# Altium PCB PCB2.PcbDoc
Units mm, origin at the board's own origin, x right, y up, seen from the top; angles counter-clockwise.
Board outline 100 x 120 mm, 2 copper layers (Top Layer, Bottom Layer); 60 components, 66 nets, 318 pads, 53 vias.
Unrouted connection lines stored in the file: 4.
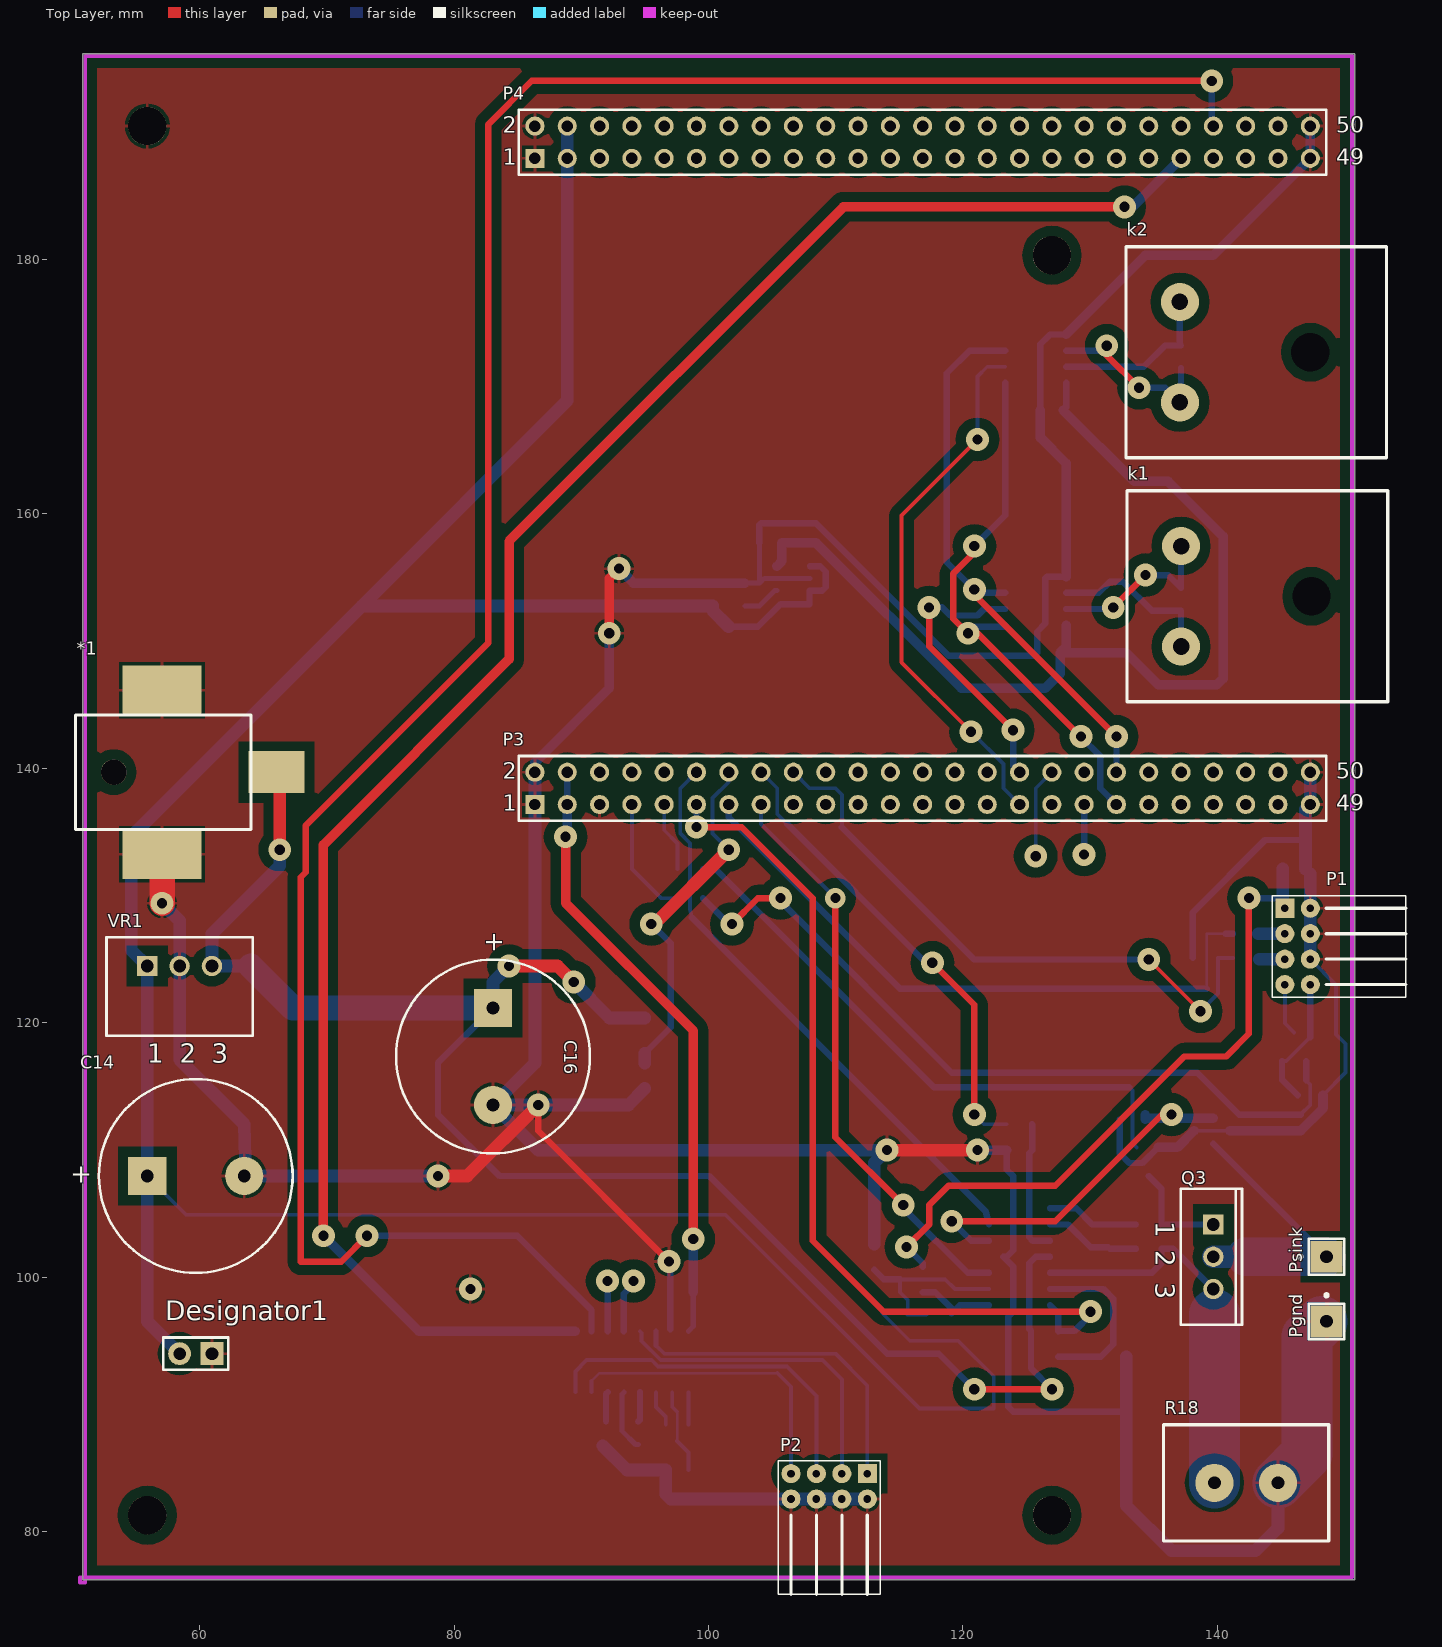
[diagram p0: Top Layer view]
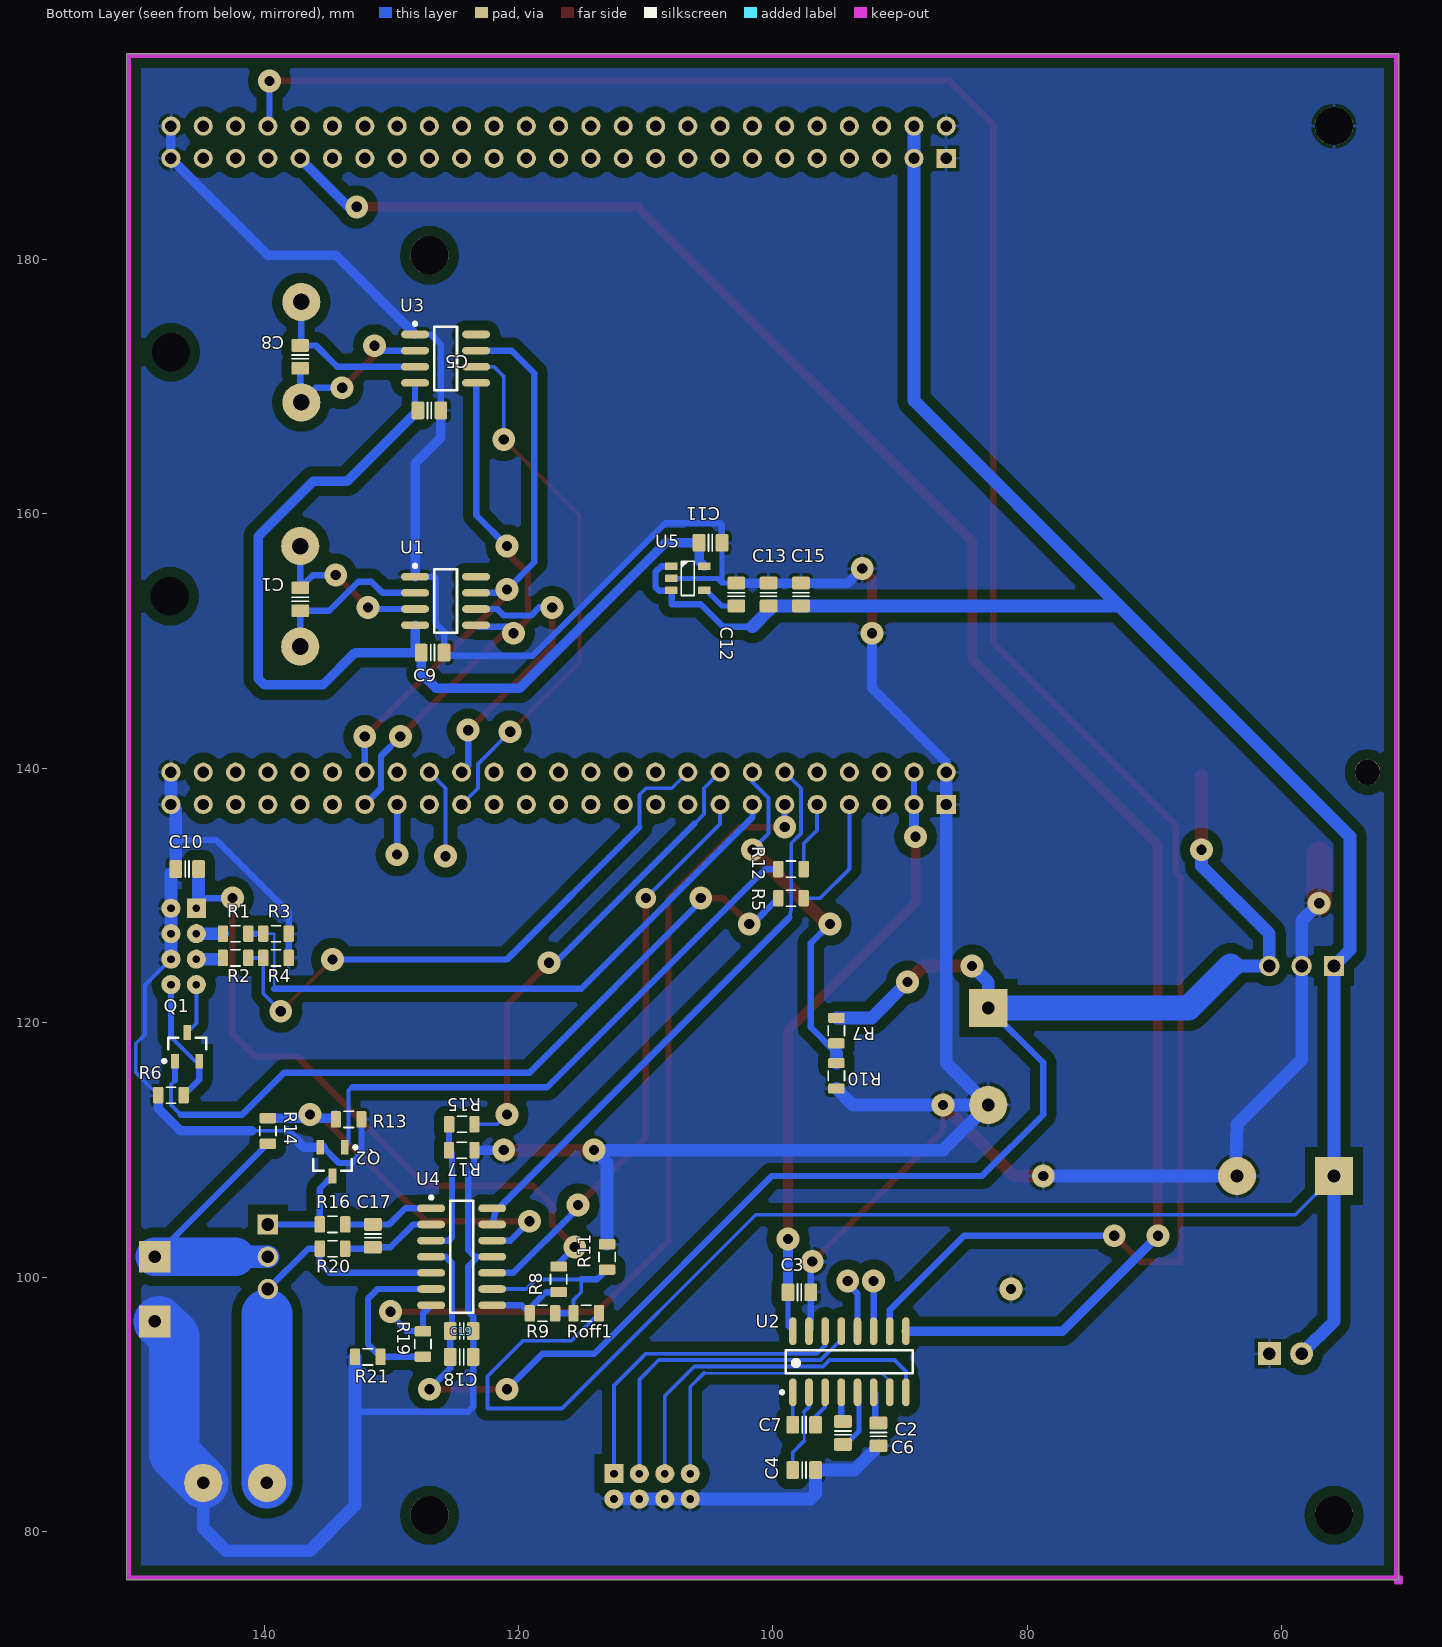
[diagram p1: Bottom Layer view, seen from below]
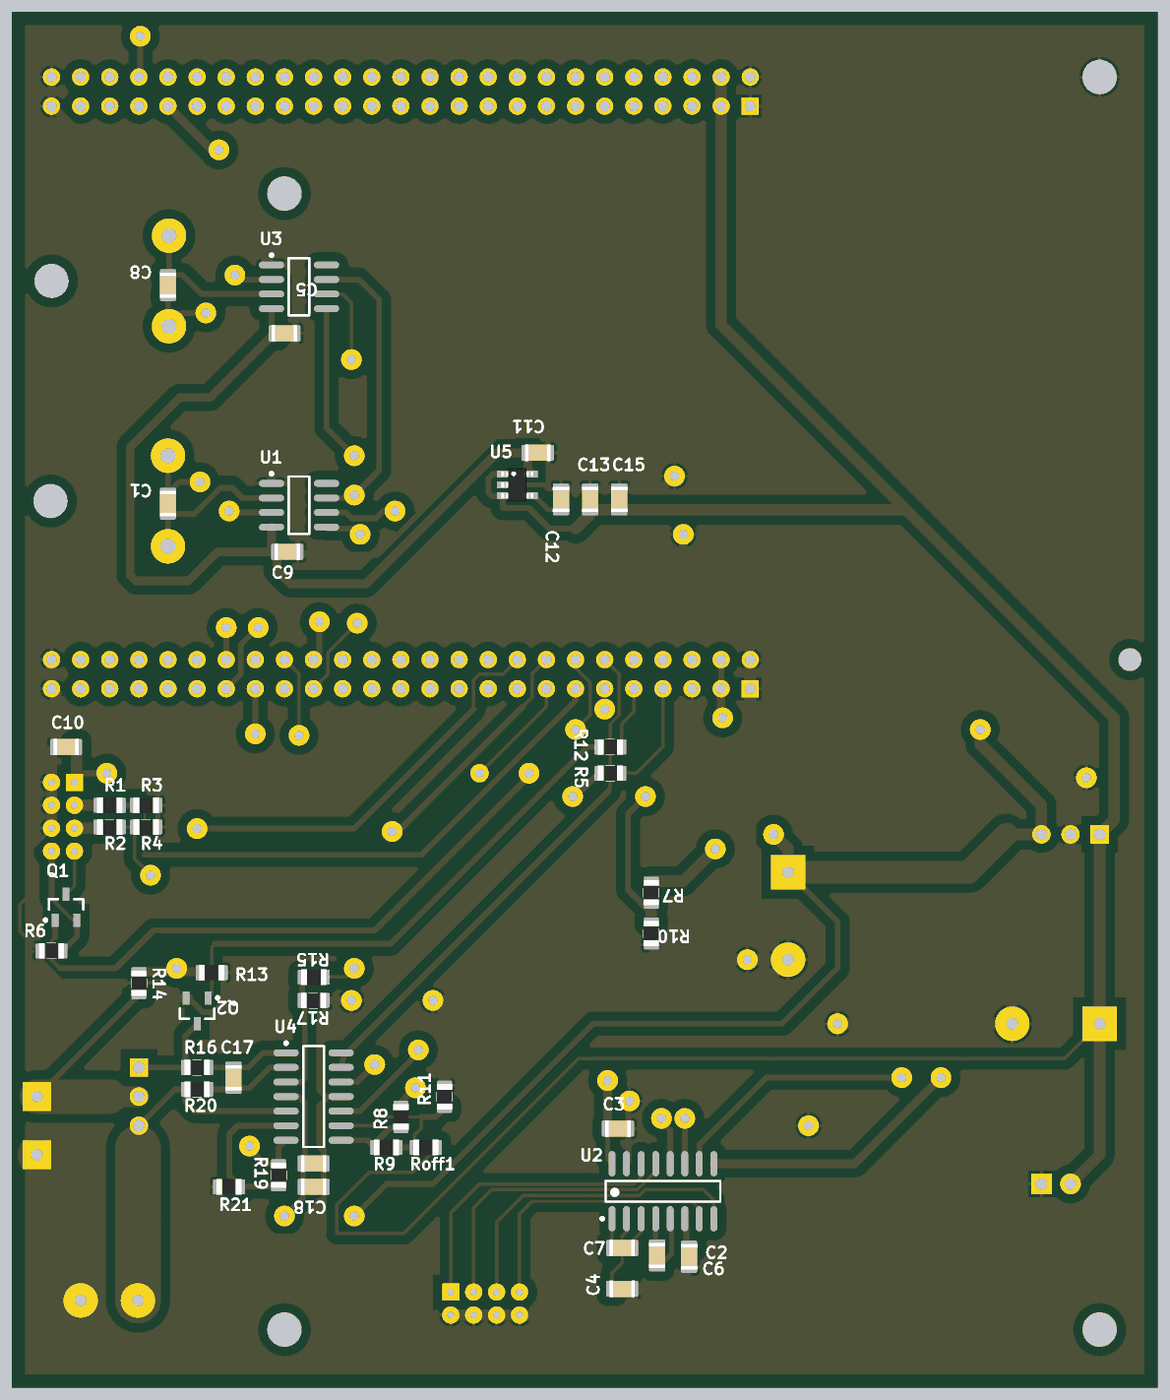
[diagram p2: 3D render of the assembled board from below, using the file's embedded part models]

## Layer stack, top to bottom
Top Layer: signal copper 0.0356
Dielectric: dielectric 0.32, FR-4, Dk 4.8
Bottom Layer: signal copper 0.0356

## Board outline
50.8,76.2 150.8,76.2 150.8,196.2 50.8,196.2

## Design rules (kind name [scope] priority, off if disabled: settings)
Clearance Clearance_1 [InPolygon] p1: gap=0.8
Clearance [All] p2: gap=0.2
HoleSize [All] p1: absolutevalues=TRUE maxlimit=4 minlimit=0.4 maxpercent=80.000 minpercent=20.000
HoleToHoleClearance [All] p1: gap=0.1 allowstackedmicrovias=TRUE
MinimumSolderMaskSliver [All] p1: minsoldermaskwidth=0
PolygonConnect [All] p1: connectstyle=Relief reliefconductorwidth=0.254 reliefentries=4 polygonreliefangle="90 Angle" airgapwidth=0.254
RoutingVias [All] p1: holewidth=0.8 width=1.8 viastyle="Through Hole" minholewidth=0.8 minwidth=1.8 maxholewidth=0.8 maxwidth=2
SilkToSilkClearance [All] p1: silktosilkclearance=0
SilkToSolderMaskClearance [IsPad] p1: minsilkscreentomaskgap=0 clearancetoexposedcopper=TRUE
SolderMaskExpansion [All] p1: expansion=0
Width [All] p1: maxlimit=5 minlimit=0.2 preferedwidth=0.4
23 further rules are at their usual default settings.

## Components (designator, comment, footprint, x,y, rotation, side; value= is the part's Value field where it differs from the comment)
*1 "DC-Jack" DC-Jack 66.04,139.7 r0 top
C1 "Cap" CAPC2012X135N 137.16,153.3 r90 bottom
C2 "Cap" CAPC2012X135N 91.694,87.63 r270 bottom
C3 "Cap" CAPC2012X135N 97.906,98.806 r0 bottom
C4 "Cap" CAPC2012X135N 97.536,84.836 r0 bottom
C5 "Cap" CAPC2012X135N 127,168.148 r0 bottom
C6 "Cap" CAPC2012X135N 94.488,87.746 r270 bottom
C7 "Cap" CAPC2012X135N 97.536,88.392 r180 bottom
C8 "Cap" CAPC2012X135N 137.16,172.35 r90 bottom
C9 "Cap" CAPC2012X135N 126.746,149.098 r0 bottom
C10 "Cap" CAPC2012X135N 146.05,132.08 r180 bottom
C11 "Cap" CAPC2012X135N 104.902,157.734 r0 bottom
C12 "Cap" CAPC2012X135N 102.87,153.67 r270 bottom
C13 "Cap" CAPC2012X135N 100.33,153.67 r270 bottom
C14 "Cap Pol1" RB7.6-15 59.69,107.95 r180 top
C15 "Cap" CAPC2012X135N 97.79,153.67 r270 bottom
C16 "Cap Pol1" RB7.6-15 83.058,117.348 r90 top
C17 "Cap" CAPC2012X135N 131.445,103.24 r90 bottom
C18 "Cap" CAPC2012X135N 124.46,93.726 r0 bottom
C19 "Cap" CAPC2012X135N 124.46,95.758 r0 bottom
Designator1 "Comment" HDR1X2 60.96,93.98 r180 top
k1 "Thermocouple Connector" "K-Type Thermocouple Connector" 137.16,149.58 r180 top
k2 "Thermocouple Connector" "K-Type Thermocouple Connector" 137.07,168.77 r180 top
P1 "Header 4X2H" CON8 145.32,129 r0 top
P2 "Header 4X2H" CON8 112.49,84.55 r270 top
P3 "Header 25X2" HDR2X25 86.36,137.16 r0 top
P4 "Header 25X2" HDR2X25 86.36,187.96 r0 top
Pgnd "Plug" PIN1 148.59,96.52 r0 top
Psink "Plug" PIN1 148.59,101.6 r90 top
Q1 "NPN" SOT-23_N 146.05,118.11 r90 bottom
Q2 "NPN" SOT-23_N 134.62,109.075 r270 bottom
Q3 "MOSFET-N" TO-220-AB 139.7,101.6 r270 top
R1 "Res2" RESC2012X70N 142.24,127 r0 bottom
R2 "Res2" RESC2012X70N 142.24,125.095 r0 bottom
R3 "Res2" RESC2012X70N 139.065,127 r0 bottom
R4 "Res2" RESC2012X70N 139.065,125.095 r0 bottom
R5 "Res2" RESC2012X70N 98.568,129.794 r180 bottom
R6 "Res2" RESC2012X70N 147.32,114.3 r180 bottom
R7 "Res2" RESC2012X70N 94.996,119.38 r90 bottom
R8 "Res2" RESC2012X70N 116.84,99.822 r90 bottom
R9 "Res2" RESC2012X70N 118.11,97.155 r0 bottom
R10 "Res2" RESC2012X70N 94.996,115.824 r90 bottom
R11 "Res2" RESC2012X70N 113.03,101.584 r270 bottom
R12 "Res2" RESC2012X70N 98.568,132.08 r180 bottom
R13 "Res2" RESC2012X70N 133.35,112.395 r180 bottom
R14 "Res2" RESC2012X70N 139.7,111.49 r90 bottom
R15 "Res2" RESC2012X70N 124.444,112.014 r180 bottom
R16 "Res2" RESC2012X70N 134.62,104.14 r0 bottom
R17 "Res2" RESC2012X70N 124.46,109.982 r0 bottom
R18 "Cer7W" Cer7W 144.78,83.82 r180 top
R19 "Res2" RESC2012X70N 127.508,94.742 r90 bottom
R20 "Res2" RESC2012X70N 134.62,102.235 r0 bottom
R21 "Res2" RESC2012X70N 131.842,93.726 r180 bottom
Roff1 "Res2" RESC2012X70N 114.665,97.155 r0 bottom
U1 "MAX31855KASA+T" MAXM-S8+4_N 125.73,153.162 r180 bottom
U2 "MAX3232CD" TI-D16_N 93.98,93.345 r90 bottom
U3 "MAX31855KASA+T" MAXM-S8+4_N 125.73,172.212 r180 bottom
U4 "TLC274BCDG4" TI-D14_N 124.46,101.6 r180 bottom
U5 "3.3V" SOT23-5 106.68,154.94 r180 bottom
VR1 "RECOM 7805" Recom78xx 58.42,124.46 r0 top

## Footprints (in the part's own frame and the unit in brackets; to place one, negate y for a bottom-side part, rotate by r counter-clockwise, add the part's x,y. Pads: shape width x height; smd on the part's side, far side on the other; paste and mask are expansions set on the pad)
CAPC2012X135N [mm] "Chip Capacitor, Body 2.0x1.2mm, EIA 0805, IPC Medium Density"
  round 0.254 on Mech15: 0(0,0)
  rrect25% 1x1.4 smd: 1(-0.9,0) 2(0.9,0)
  Top Layer pour cut-out: -0.675,0.7 -0.475,0.9 0.475,0.9 0.675,0.7 0.675,-0.7 0.475,-0.9 -0.475,-0.9 -0.675,-0.7
  silkscreen extent -0.15,-0.65 0.15,0.65, body extent -1.1,-0.72 1.1,0.73, height 1.34
Cer7W [mm]
  round 3 hole 1: 1(0,0) 2(5,0)
  silkscreen extent -4,-4.57 9,4.57
CON8 [mm]
  rect 1.5x1.5 hole 0.6: 1(0,0)
  round 1.5 hole 0.6: 2(2,0) 3(0,-2) 4(2,-2) 5(0,-4) 6(2,-4) 7(0,-6) 8(2,-6)
  silkscreen extent -1,-7 9.5,1
DC-Jack [mm]
  round 2 hole 2 paste+0 mask+0: 0(-12.8,0)
  rect 6.2x3.9 smd: 1(-9,-6.45) 1(-9,6.45)
  rect 4.4x3.3 smd: 2(0,0)
  silkscreen extent -15.8,-4.5 -2,4.5
HDR1X2 [mm] "Connector; Header; 2 Position"
  rect 1.8x1.8 hole 1: 1(0,0)
  round 1.8 hole 1: 2(2.54,0)
  silkscreen extent -1.27,-1.27 3.81,1.27
HDR2X25 [mm] "Connector; Header; 25x2 Position"
  rect 1.5x1.5 hole 0.9: 1(0,0)
  round 1.5 hole 0.9: 2(0,2.54) 3(2.54,0) 4(2.54,2.54) 5(5.08,0) 6(5.08,2.54) 7(7.62,0) 8(7.62,2.54) 9(10.16,0) 10(10.16,2.54) 11(12.7,0) 12(12.7,2.54) 13(15.24,0) 14(15.24,2.54) 15(17.78,0) 16(17.78,2.54) 17(20.32,0) 18(20.32,2.54) 19(22.86,0) 20(22.86,2.54) 21(25.4,0) 22(25.4,2.54) 23(27.94,0) 24(27.94,2.54) 25(30.48,0) 26(30.48,2.54) 27(33.02,0) 28(33.02,2.54) 29(35.56,0) 30(35.56,2.54) 31(38.1,0) 32(38.1,2.54) 33(40.64,0) 34(40.64,2.54) 35(43.18,0) 36(43.18,2.54) 37(45.72,0) 38(45.72,2.54) 39(48.26,0) 40(48.26,2.54) 41(50.8,0) 42(50.8,2.54) 43(53.34,0) 44(53.34,2.54) 45(55.88,0) 46(55.88,2.54) 47(58.42,0) 48(58.42,2.54) 49(60.96,0) 50(60.96,2.54)
  silkscreen extent -1.27,-1.27 62.23,3.81
"K-Type Thermocouple Connector" [mm]
  round 3 hole 1.3: 1(0,-7.9) 2(0,0)
  round 0 hole 3 unplated: 3(-10.25,-3.95)
  silkscreen extent -16.25,-12.25 4.25,4.35
MAXM-S8+4_N [mm] "SOIC, 8-Leads, Body 4.9x3.9mm, Pitch 1.27mm, IPC Medium Density"
  oval 2.2x0.6 smd: 1(-2.4,1.905) 2(-2.4,0.635) 3(-2.4,-0.635) 4(-2.4,-1.905) 5(2.4,-1.905) 6(2.4,-0.635) 7(2.4,0.635) 8(2.4,1.905)
  silkscreen extent -2.53,-2.5 0.9,2.88, body extent -2,-2.5 2,2.5, height 1.75
PIN1 [mm] "Connector; Plug"
  rect 2.5x2.5 hole 1: 1(0,0)
  silkscreen extent -1.4,-1.4 1.4,2.17
RB7.6-15 [mm] "Polarized Capacitor (Radial); 2 Leads"
  rect 3x3 hole 1: 1(3.81,0)
  round 3 hole 1: 2(-3.81,0)
  silkscreen extent -7.62,-7.62 7.62,7.62
Recom78xx [mm]
  rect 1.6x1.6 hole 1: 1(-2.54,0)
  round 1.6 hole 1: 2(0,0) 3(2.54,0)
  silkscreen extent -5.75,-5.5 5.75,2.25
RESC2012X70N [mm] "Chip Resistor, Body 2.0x1.2mm, EIA 0805, IPC Medium Density"
  round 0.254 on Mech15: 0(0,0)
  rrect25% 0.8x1.3 smd: 1(-1,0) 2(1,0)
  Top Layer pour cut-out: -0.725,0.65 -0.525,0.85 0.525,0.85 0.725,0.65 0.725,-0.65 0.525,-0.85 -0.525,-0.85 -0.725,-0.65
  silkscreen extent -0.38,-0.64 0.38,0.64, body extent -1.1,-0.67 1.1,0.68, height 0.69
SOT23-5 [mm]
  round 0.5 on Mech15: 0(0,0)
  rrect25% 1x0.6 smd: 1(-1.3,0.95) 2(-1.3,0) 3(-1.3,-0.95) 4(1.3,-0.95) 5(1.3,0.95)
  silkscreen extent -0.51,-1.35 0.51,1.35, body extent -1.4,-1.45 1.4,1.45, height 1.44
SOT-23_N [mm] "SOT23, 3-Leads, Body 2.9x1.3mm, Pitch 0.95mm, Lead Span 2.5mm, IPC Medium Density"
  rect 1.15x0.6 smd: 1(-1.125,0.95) 2(-1.125,-0.95) 3(1.125,0)
  silkscreen extent -1.25,-1.5 0.7,1.93, body extent -0.7,-1.5 0.7,1.5, height 1.1
TI-D14_N [mm] "SOIC, 14-Leads, Body 8.65x3.90mm, Pitch 1.27mm, IPC Medium Density"
  oval 2.2x0.6 smd: 1(-2.4,3.81) 2(-2.4,2.54) 3(-2.4,1.27) 4(-2.4,0) 5(-2.4,-1.27) 6(-2.4,-2.54) 7(-2.4,-3.81) 8(2.4,-3.81) 9(2.4,-2.54) 10(2.4,-1.27) 11(2.4,0) 12(2.4,1.27) 13(2.4,2.54) 14(2.4,3.81)
  silkscreen extent -2.53,-4.4 0.9,4.78, body extent -2,-4.38 2,4.38, height 1.75
TI-D16_N [mm] "SOIC, 16-Leads, Body 9.9x3.9mm, Pitch 1.27mm, IPC Medium Density"
  oval 2.2x0.6 smd: 1(-2.4,4.445) 2(-2.4,3.175) 3(-2.4,1.905) 4(-2.4,0.635) 5(-2.4,-0.635) 6(-2.4,-1.905) 7(-2.4,-3.175) 8(-2.4,-4.445) 9(2.4,-4.445) 10(2.4,-3.175) 11(2.4,-1.905) 12(2.4,-0.635) 13(2.4,0.635) 14(2.4,1.905) 15(2.4,3.175) 16(2.4,4.445)
  silkscreen extent -2.52,-5 0.9,5.42, body extent -1.99,-5 1.99,5, height 1.75
TO-220-AB [mm] "TO, Thru-Hole, Vertical, Heatsink Mounted; 3 In-Line Leads; Pitch 2.54 mm"
  rect 1.6x1.6 hole 1: 1(-2.54,0)
  round 1.6 hole 1: 2(0,0) 3(2.54,0)
  silkscreen extent -5.35,-2.55 5.35,2.25

## Part data
C1 C2 C3 C4 C5 C6 C7 C8 C9 C10 C11 C12 C13 C15 C17 C18 C19: "Capacitor"
C14 C16: "Polarized Capacitor (Radial)"
P1 P2: "Header, 4-Pin, Dual row, Right Angle"
P3 P4: "Header, 25-Pin, Dual row"
Q1 Q2: "NPN Bipolar Transistor"
Q3: "N-Channel MOSFET"
R1 R2 R3 R4 R5 R6 R7 R8 R9 R10 R11 R12 R13 R14 R15 R16 R17 R19 R20 R21 Roff1: "Resistor"
R18: library part Res2, "Resistor"
U1 U3: "Cold Junction Compensated Thermocouple to Digital Converter, 14 Bits Temperature Resolution, -40 to 125 degC, 8-Pin SOIC (S8+4), Pb-Free, Tape ang Reel"
U2: "3-V to 5.5-V Multichannel RS-232 Line Driver / Receiver with ±15-kV ESD Protection, 0 to 70 degC, 16-Pin SOIC (D), Green (RoHS & no Sb/Br)"
U4: "LinCMOS(TM) Precision Quad Operational Amplifier, 3 to 16 V, 0 to 70 degC, 14-pin SOIC (D14), Green (RoHS & no Sb/Br)"
U5: library part LinREG_3V3_400mA_TPS73633DBV, "IC LDO Regulator 3.3V 400mA SOT23-5 SMD"
VR1: library part "Volt Reg", "Voltage Regulator"

## Free pads (board coordinates)
  round 3 hole 3: 0(55.88,81.28) 0(55.88,190.5) 0(127,81.28) 0(127,180.34)

## Via types
v1: diameter 1.8, hole 0.8, Top Layer to Bottom Layer, 52 vias
v2: diameter 1.6, hole 0.8, Top Layer to Bottom Layer, 1 vias

## Nets (pads, with @x,y where several pads share a name; then routed paths per layer and width w, separated by ;. In a path a pad name is that pad's centre, name@x,y a point inside that pad or via, vN(x,y) a via of type N, cw(c..) or ccw(c..) an arc to the next point about the centre after c; other vN are vias at no path point)
3V: P4.5 P4.6
5V: C13.2 C14.1 C15.2 Designator1.2 P4.3 P4.4 Roff1.1 U5.1 U5.3 VR1.1 | length 241.7
  Bottom Layer w0.3: C14.1 58.928,104.902 101.346,104.902 116.586,89.662 122.428,89.662 122.428,92.202 119.634,94.996 115.824,94.996 Roff1.1
  Bottom Layer w0.5: 101.6,151.13 103.886,151.13 105.664,152.908 107.95,152.908 107.95,153.96 108.93,153.96 109.22,154.25 109.22,155.448 108.778,155.89 U5.1
  Bottom Layer w1: Designator1.2 55.88,96.52 C14.1 VR1.1 54.61,125.73 54.61,134.62 72.76,152.77 ; P4.4 P4.3 88.9,168.91 72.76,152.77 ; 101.6,151.13 100.33,152.4 C13.2 C15.2 72.76,152.77
AGND: *1.1 C2.2 C3.1 C4.1 C5.1 C9.1 C10.1 C11.1 C12.1 C13.1 C14.2 C15.1 C16.2 C18.1 C19.1 Designator1.1 P1.2 P1.4 P1.6 P2.2 P2.4 P2.6 P2.8 P3.1 P3.2 P3.5 P3.49 P3.50 P4.1 P4.2 P4.49 P4.50 pad.0@55.88,190.5 Pgnd.1 Q2.2 R3.1 R4.1 R6.1 R10.1 R11.1 R13.2 R17.1 R18.1 R21.1 U1.1 U2.15 U3.1 U4.11 U5.2 VR1.2 | length 448.5
  Top Layer w0.5: v1(86.614,113.538) 86.614,111.506 v1(96.901,101.219)
  Top Layer w0.75: v1(92.202,150.622) 92.202,154.94 v1(92.964,155.702)
  Top Layer w1: v1(78.74,107.95) 81.026,107.95 v1(86.614,113.538) ; v1(114.046,109.982) v1(121.158,109.982)
  Top Layer w2: v1(57.04,129.396) *1.1@57.04,133.25
  Bottom Layer w0.3: 138.176,111.506 140.97,111.506 ; P1.6 149.352,122.968 149.352,119.086 150.094,118.344 150.094,116.074 R6.1
  Bottom Layer w0.4: C12.1 104.024,154.57 ; C11.1 104.002,154.592 104.024,154.57 ; U5.2 104.394,154.94 104.024,154.57
  Bottom Layer w0.5: v1(96.901,101.219) 97.006,101.114 C3.1 U2.15@97.006,95.894 ; C11.1 104.002,159.142 104.013,159.131 104.14,159.258 108.458,159.258 118.872,148.844 125.592,148.844 C9.1 125.846,150.738 126.492,151.384 126.492,154.94 126.619,155.067 U1.1 ; R17.1 123.46,108.442 123.952,107.95 123.952,102.108 123.444,101.6 123.19,101.6 123.952,100.838 123.952,97.282 123.56,96.89 C19.1 C18.1 123.56,89.8 123.952,89.408 132.842,89.408 ; C5.1 126.1,173.344 126.873,174.117 U3.1 ; R13.2 132.334,112.379 132.334,109.728 133.096,108.966 134.125,108.966 Q2.2@135.359,110.2 ; R4.1 R3.1 138.065,128.667 143.764,134.366 146.95,134.366
  Bottom Layer w0.75: P3.2 86.36,140.462 92.202,146.304 v1(92.202,150.622) ; v1(92.964,155.702) 94.096,154.57 C15.1 C13.1 C12.1 ; v1(121.158,109.982) R17.1 ; C5.1 126.1,166 128.13,163.97 U1.1 ; U3.1 134.353,180.34 139.7,180.34 P4.49 P4.50 ; Q2.2@135.359,110.2 Q2.2 136.87,110.2 138.176,111.506 ; 140.97,111.506 146.558,111.506 148.32,113.268 R6.1
  Bottom Layer w1: v1(57.04,129.396) 58.42,128.016 VR1.2 58.42,117.094 63.5,112.014 63.627,107.95 v1(78.74,107.95) ; P3.2 P3.1 86.36,116.84 C16.2 ; C2.2 93.588,84.836 C4.1 96.636,82.942 97.028,82.55 P2.8 P2.6 P2.4 P2.2 ; R10.1 93.71,113.538 v1(86.614,113.538) C16.2 ; R11.1 113.03,108.966 v1(114.046,109.982) 86.614,109.982 C16.2 ; R21.1 132.842,82.042 136.398,78.486 143.002,78.486 144.78,80.264 R18.1 ; C10.1 146.95,134.366 146.95,136.79 P3.49 P3.50 ; P1.6 P1.4 P1.2 C10.1@147.32,131.71
  Bottom Layer w4: R18.1 147.066,86.106 147.066,95.336 Pgnd.1@148.25,96.52
  other v1: 81.28,99.06
BOOT0: P4.21
CMON: P1.5 R2.2 | length 2
  Bottom Layer w1: R2.2@143.335,125 P1.5
CS0: P3.31 U3.6 | length 42.5
  Top Layer w0.3: v1(120.65,142.875) 115.189,148.336 115.189,159.893 v1(121.158,165.862)
  Bottom Layer w0.3: v1(120.65,142.875) 123.19,140.335 123.19,138.43 P3.31 ; v1(121.158,165.862) 121.158,170.815 121.92,171.577 U3.6
CS1: P3.32 U1.6 | length 22.4
  Top Layer w0.5: v1(117.348,152.654) 117.348,149.606 v1(123.952,143.002)
  Bottom Layer w0.5: v1(117.348,152.654) 118.364,152.654 118.999,152.019 121.158,152.019 121.666,152.527 U1.6 ; v1(123.952,143.002) 123.952,140.208 P3.32
DAC1: P3.16 R15.2 | length 37
  Top Layer w0.5: v1(117.602,124.714) 120.904,121.412 v1(120.904,112.776)
  Bottom Layer w0.3: P3.16 105.41,138.43 105.41,136.398 106.172,135.636 ; v1(120.904,112.776) 121.666,112.014 R15.2
  Bottom Layer w0.5: 106.172,135.636 117.094,124.714 v1(117.602,124.714)
DAC2: P3.15 U4.10 | length 45.1
  Top Layer w0.5: v2(109.982,129.794) 109.982,110.998 v1(115.316,105.664) v1@115.824,105.664
  Bottom Layer w0.3: P3.15 104.14,135.636 v2(109.982,129.794)
  Bottom Layer w0.5: v1@115.57,105.156 120.396,100.33 U4.10
DGND: P1.8 Q1.2 R6.2 | length 10.3
  Bottom Layer w0.3: Q1.2 145.433,116.985 147.32,118.872
  Bottom Layer w0.5: Q1.2 145.1,115.52 R6.2 ; 147.32,118.872 P1.8
GFET: Q2.3 Q3.1 R16.2 | length 8.3
  Bottom Layer w0.5: Q2.3 135.62,106.95 R16.2 Q3.1
ICONTROLV: C10.2 P1.1 R8.2 | length 52.4
  Top Layer w0.5: v1(115.57,102.362) 117.348,104.14 117.348,105.664 118.872,107.188 127.254,107.188 137.414,117.348 140.716,117.348 142.494,119.126 v1(142.494,129.794)
  Bottom Layer w0.5: v1(115.57,102.362) 116.84,101.092 R8.2 ; v1(142.494,129.794) 144.526,129.794
  Bottom Layer w1: P1.1@145.15,129.17 C10.2
MISO: P3.38 U1.7 U3.7 | length 44.3
  Top Layer w0.5: v1@120.904,153.67 v1(132.08,142.494)
  Bottom Layer w0.5: v1@120.904,153.797 U1.7 ; v1(120.904,154.051) 118.745,156.21 118.745,171.069 120.523,172.847 U3.7 ; P3.38 v1(132.08,142.494)
MOSI: P3.39
NetC1_1: C1.1 k1.2 U1.2 | length 13.2
  Bottom Layer w0.5: U1.2 130.683,153.797 131.572,154.686 132.588,154.686 134.874,152.4 C1.1 k1.2
NetC1_2: C1.2 k1.1 U1.3 | length 13.8
  Top Layer w0.5: v1(131.826,152.654) v1(134.366,155.194)
  Bottom Layer w0.5: U1.3 131.699,152.527 v1(131.826,152.654) ; v1(134.366,155.194) 136.166,155.194 C1.2 k1.1
NetC2_1: C2.1 U2.6 | length 2.4
  Bottom Layer w0.5: C2.1@91.948,88.646 91.948,90.818 U2.6
NetC4_2: C4.2 U2.2 | length 6.6
  Bottom Layer w0.2: 97.536,87.122 97.536,89.408
  Bottom Layer w0.3: U2.2 97.155,89.789 97.536,89.408 ; 97.536,87.122 98.436,86.222 C4.2
NetC6_1: C6.1 U2.4 | length 2.4
  Bottom Layer w0.5: C6.1 94.615,88.773 U2.4
NetC6_2: C6.2 U2.5 | length 4.8
  Bottom Layer w0.4: U2.5 93.218,90.818 93.218,87.884 94.256,86.846 C6.2
NetC7_1: C7.1 U2.1 | length 2.5
  Bottom Layer w0.3: C7.1 U2.1@98.436,90.934
NetC7_2: C7.2 U2.3 | length 2.9
  Bottom Layer w0.3: U2.3 95.885,89.789 96.636,89.038 C7.2
NetC8_1: C8.1 k2.2 U3.2 | length 13.4
  Top Layer w0.5: v1(131.318,173.228) 131.318,172.466 v1(133.858,169.926)
  Bottom Layer w0.5: U3.2 v1@130.937,172.847 ; v1(133.858,169.926) 135.914,169.926 k2.2 ; k2.2@137.16,168.86 C8.1
NetC8_2: C8.2 k2.1 U3.3 | length 13.1
  Bottom Layer w0.5: U3.3 134.239,171.577 135.912,173.25 C8.2 ; C8.2@137.07,173.34 k2.1
NetC12_2: C12.2 U5.4 | length 3
  Bottom Layer w0.4: C12.2 104.002,152.77 105.222,153.99 U5.4
NetC17_1: C17.1 R20.1 U4.2 | length 7.5
  Bottom Layer w0.5: U4.2 128.27,104.14 130.07,102.34 C17.1 131.55,102.235 R20.1
NetC17_2: C17.2 R16.1 U4.1 | length 7.3
  Bottom Layer w0.5: U4.1 128.905,105.41 130.175,104.14 C17.2 R16.1
NetPsink_1: Psink.1 Q3.2 R14.1 | length 21.5
  Bottom Layer w0.5: R14.1 Psink.1
  Bottom Layer w1.8: Q3.2 142.24,101.6
  Bottom Layer w3: 142.24,101.6 Psink.1
NetQ1_2: Q1.1 R5.1 | length 60.5
  Top Layer w0.5: v1(101.854,127.762) 103.886,129.794 v1(105.664,129.794)
  Bottom Layer w0.3: 146.558,112.776 147.32,113.538 147.32,115.15 147,115.47
  Bottom Layer w0.5: R5.1 101.6,127.762 v1(101.854,127.762) ; v1(105.664,129.794) 105.664,129.54 119.126,116.078 138.43,116.078 141.732,112.776 146.558,112.776 ; 147,115.47 Q1.1
NetQ2_2: Q2.1 R12.1 | length 45.6
  Bottom Layer w0.3: 133.08,114.935 133.35,114.665 133.35,110.52 Q2.1
  Bottom Layer w0.5: R12.1 100.584,132.08 117.729,114.935 133.08,114.935
NetQ3_3: Q3.3 R18.2 R20.2 U4.5 | length 30.8
  Bottom Layer w0.5: U4.5 134.874,100.33 135.62,101.076 R20.2 136.525,102.235 Q3.3
  Bottom Layer w1: 139.78,97.075 Q3.3@139.78,98.98
  Bottom Layer w4: R18.2 139.78,97.075
NetR8_1: R8.1 R9.2 U4.8 | length 6.4
  Bottom Layer w0.5: R8.1 117.84,98.822 119.11,97.552 R9.2 119.745,97.79 U4.8
NetR9_1: R9.1 R11.2 Roff1.2 U4.9 | length 14
  Bottom Layer w0.3: Roff1.2 115.665,98.203 115.062,98.806 115.062,99.822 118.618,99.822 119.38,99.06 U4.9
  Bottom Layer w0.5: R11.2 113.792,99.822 115.062,99.822 ; Roff1.2 R9.1
NetR13_1: R13.1 R14.2 U4.12 | length 30.1
  Top Layer w0.5: v1(119.126,104.394) 127.254,104.394 v1@136.144,113.284
  Bottom Layer w0.5: v1(119.126,104.394) 120.65,102.87 U4.12 ; v1@137.073,112.49 v1@137.073,112.522
  Bottom Layer w0.75: R13.1@134.35,112.76 R13.1 134.445,112.49 137.073,112.49 R14.2
  other v1: 136.398,112.776
NetR15_1: R15.1 R17.2 U4.3 | length 10.7
  Bottom Layer w0.5: R15.1 125.46,111.998 R17.2 125.222,109.744 125.222,103.124 125.476,102.87 U4.3
NetR19_1: R19.1 R21.2 U4.6 | length 13.6
  Bottom Layer w0.5: U4.6 131.064,99.06 131.826,98.298 131.826,94.71 R21.2 130.826,93.742 R19.1
PA0: P3.12 U4.13 U4.14 | length 46
  Bottom Layer w0.3: 98.692,128.27 98.552,128.918 98.552,134.112 97.79,134.874 97.79,138.43 P3.12
  Bottom Layer w0.5: 98.692,128.27 121.806,105.156 U4.13
PA1: P3.11 R19.2 U4.7 | length 70
  Top Layer w0.5: v1(99.06,135.382) 102.616,135.382 108.204,129.794 108.204,102.87 113.792,97.282 v1(130.048,97.282)
  Bottom Layer w0.5: v1(99.06,135.382) P3.11 ; U4.7 127.508,97.142 R19.2 127.524,95.758 128.778,95.758 130.048,97.028 v1(130.048,97.282)
PA2: P3.14 R7.1 R10.2 | length 28.1
  Top Layer w1: v1(95.504,127.762) 95.758,127.762 v1(101.6,133.604)
  Bottom Layer w0.3: v1(101.6,133.604) 100.33,134.874 100.33,137.668 101.6,138.938 P3.14
  Bottom Layer w0.5: 94.996,117.602 97.028,119.634 97.028,126.238 v1(95.504,127.762)
  Bottom Layer w1: R10.2 94.996,117.602
PA3: P3.13 R1.1 R3.2 | length 50.6
  Bottom Layer w0.2: 139.192,122.682 139.192,127 R3.2 140.653,127
  Bottom Layer w0.5: P3.13 101.6,136.144 115.062,122.682 139.192,122.682 ; 140.653,127 R1.1
PA6: P3.18 R2.1 R4.2 | length 47.2
  Top Layer w0.3: v1(134.62,124.968) v1(138.684,120.904)
  Bottom Layer w0.3: P3.18 107.95,138.43 109.982,138.43 110.49,137.922 110.49,135.382 ; v1(138.684,120.904) 140.065,122.285 R4.2 R2.1
  Bottom Layer w0.5: 110.49,135.382 120.904,124.968 v1(134.62,124.968)
PA7: P3.17
PA8: P4.43
PA13: P4.42
PA15: P4.40
PB12: P3.36
PC0: P3.8
PC1: P3.7 R5.2 | length 9.6
  Bottom Layer w0.3: P3.7 93.98,132.08 96.266,129.794 R5.2
PC2: P3.10
PC3: P3.9 R12.2 | length 5.5
  Bottom Layer w0.3: P3.9 96.52,135.128 97.568,134.08 R12.2
PD8: P3.40
PE15: P3.33
REM-SB: P1.7 Q1.3 | length 4.1
  Bottom Layer w0.3: P1.7 145.32,119.965 Q1.3
RXD1: P2.3 U2.13 | length 25.2
  Bottom Layer w0.3: U2.13 94.742,95.618 94.742,94.98 96.25,93.472 108.966,93.472 110.49,91.948 P2.3
RXD2: P2.5 U2.8 | length 28.2
  Bottom Layer w0.3: U2.8 89.535,92.583 90.424,93.472 95.543,93.472 96.043,92.972 106.172,92.972 108.49,90.654 P2.5
SCK: P3.37 U1.5 U3.5 | length 43.8
  Top Layer w0.5: v1(120.904,157.48) 120.904,156.972 119.253,155.321 119.253,151.765 v1(120.396,150.622) 121.158,150.622 v1(129.286,142.494)
  Bottom Layer w0.5: v1(120.396,150.622) 120.904,151.13 123.203,151.13 U1.5 ; v1(120.904,157.48) 123.33,159.906 U3.5 ; v1(129.286,142.494) 130.81,140.97 130.81,138.43 P3.37
TXD1: P2.1 U2.14 | length 26
  Bottom Layer w0.3: 95.885,94.615 96.52,93.98 109.982,93.98 112.49,91.472 P2.1
  Bottom Layer w0.4: 95.885,94.615 U2.14
TXD2: P2.7 U2.7 | length 24.1
  Bottom Layer w0.2: U2.7@90.805,91.821 91.44,92.456 105.41,92.456
  Bottom Layer w0.3: U2.7 U2.7@90.805,91.821 ; 105.41,92.456 106.49,91.376 P2.7
U1RX: P4.41 U2.9 | length 148.9
  Top Layer w0.75: v1(69.723,103.251) 69.723,133.985 84.328,148.59 84.328,157.861 110.617,184.15 v1(132.715,184.15)
  Bottom Layer w0.75: v1(69.723,103.251) 77.229,95.745 U2.9 ; v1(132.715,184.15) 133.35,184.15 P4.41
U1TX: P4.44 U2.10 | length 185
  Top Layer w0.5: v1(73.152,103.251) 71.12,101.219 67.945,101.219 67.945,131.445 68.326,131.826 68.326,135.509 82.677,149.86 82.677,190.627 86.106,194.056 v1(139.573,194.056)
  Bottom Layer w0.5: v1(73.152,103.251) 84.963,103.251 90.805,97.409 U2.10 ; P4.44@139.573,190.627 v1(139.573,194.056)
U3RX: P3.35 U2.11 | length 7.6
  Bottom Layer w0.5: U2.11 v1@92.075,99.441 ; v1(129.54,133.223) P3.35
  other v1: 92.075,99.695
U3TX: P3.34 U2.12 | length 11.1
  Bottom Layer w0.3: v1(125.73,133.096) 125.73,138.43 P3.34
  Bottom Layer w0.5: U2.12 93.345,98.679 v1@94.107,99.441
  other v1: 94.107,99.695
VCC: C5.2 C9.2 C11.2 U1.4 U3.4 U5.5 | length 76.9
  Bottom Layer w0.5: C5.2@128.13,168.378 U3.4
  Bottom Layer w0.75: U5.5 105.78,156.29 C11.2@105.78,157.734 ; C11.2 108.458,157.734 119.888,146.304 126.492,146.304 127.646,147.458 C9.2 ; C5.2 133.488,162.56 136.144,162.56 140.462,158.242 140.462,147.066 139.954,146.558 135.382,146.558 132.842,149.098 C9.2 ; U1.4 128.13,149.582 C9.2
VDD: C3.2 P3.3 P3.4 P4.22 U2.16 | length 48.3
  Top Layer w0.75: v1(88.773,134.62) 88.773,129.413 98.806,119.38 v1(98.806,102.997)
  Bottom Layer w0.4: U2.16 98.806,96.126 C3.2
  Bottom Layer w0.5: P3.3 P3.4
  Bottom Layer w0.75: v1(88.773,134.62) 88.9,134.747 P3.3 ; C3.2 v1(98.806,102.997)
VIN: *1.2 C16.1 C18.2 C19.2 R7.2 U4.4 VR1.3 | length 136.7
  Top Layer w0.5: v1(120.904,91.186) v1(127,91.186)
  Top Layer w1: v1(66.294,133.604) *1.2@66.294,139.446 ; v1(84.328,124.46) 88.138,124.46 v1(89.408,123.19)
  Bottom Layer w0.5: C16.1 78.74,116.84 78.74,112.776 83.566,107.95 100.076,107.95 114.046,93.98 118.11,93.98 v1(120.904,91.186) ; U4.4 125.73,101.6 125.222,101.092 125.222,95.896 C19.2 C18.2 125.36,92.826 v1(127,91.186)
  Bottom Layer w1: 64.008,124.46 VR1.3 60.96,127 66.294,132.334 v1(66.294,133.604) ; C16.1 83.058,123.19 v1(84.328,124.46) ; v1(89.408,123.19) 92.218,120.38 R7.2
  Bottom Layer w2: 64.008,124.46 67.31,121.158 C16.1
VMON: P1.3 R1.2 | length 2.1
  Bottom Layer w1: R1.2 P1.3
pads on no net: *1.0 C1.0 C2.0 C3.0 C4.0 C5.0 C6.0 C7.0 C8.0 C9.0 C10.0 C11.0 C12.0 C13.0 C15.0 C17.0 C18.0 C19.0 k1.3 k2.3 P3.6 P3.19 P3.20 P3.21 P3.22 P3.23 P3.24 P3.25 P3.26 P3.27 P3.28 P3.29 P3.30 P3.41 P3.42 P3.43 P3.44 P3.45 P3.46 P3.47 P3.48 P4.7 P4.8 P4.9 P4.10 P4.11 P4.12 P4.13 P4.14 P4.15 P4.16 P4.17 P4.18 P4.19 P4.20 P4.23 P4.24 P4.25 P4.26 P4.27 P4.28 P4.29 P4.30 P4.31 P4.32 P4.33 P4.34 P4.35 P4.36 P4.37 P4.38 P4.39 P4.45 P4.46 P4.47 P4.48 R1.0 R2.0 R3.0 R4.0 R5.0 R6.0 R7.0 R8.0 R9.0 R10.0 R11.0 R12.0 R13.0 R14.0 R15.0 R16.0 R17.0 R19.0 R20.0 R21.0 Roff1.0 U1.8 U3.8 U5.0

## Polygon pours and split planes (outlines as drawn)
AGND on Bottom Layer "Top Layer-No Net" (solid, pour order 2): 51,196 150.6,196 150.6,76.4 51,76.4 51,196 51.142,196 51.689,195.453 51.142,196 51,196
AGND on Top Layer "Top Layer-No Net" (solid, pour order 4): 51,196 150.6,196 150.6,76.454 150.546,76.4 51,76.4 51,196

## Keep-outs
Keep-Out Layer:
  lines w0.3: 51,76.4 50.6,76.4 50.6,76 51,76 51,76.4 ; 51,76.4 51,196 150.6,196 150.6,76.4 51,76.4

## Silkscreen, mask and mechanical layers (free items; w line width, h text height)
Drill Drawing:
  text ".LEGEND" at 155.88,81.28 h1.52
  text "Drill Drawing." at 155.88,78.74 h1.52

## Dimensions
50.8,76.2 to 51,76.4 on Mechanical 1
50.8,76.2 to 51,76.4 on Mechanical 1

## Text inside footprints (layer, text, board x,y; h text height)
C14: Top Overlay "+" at 51.558,108.687 h1.5 r180
C16: Top Overlay "+" at 83.795,125.48 h1.5 r90
P3: Top Overlay "50" at 149.352,139.192 h1.27; Top Overlay "49" at 149.352,136.652 h1.27; Top Overlay "1" at 83.82,136.652 h1.27; Top Overlay "2" at 83.82,139.192 h1.27
P4: Top Overlay "50" at 149.352,189.992 h1.27; Top Overlay "49" at 149.352,187.452 h1.27; Top Overlay "1" at 83.82,187.452 h1.27; Top Overlay "2" at 83.82,189.992 h1.27
Q3: Top Overlay "3" at 135.175,99.56 h1.5 r270; Top Overlay "2" at 135.175,102.1 h1.5 r270; Top Overlay "1" at 135.175,104.39 h1.5 r270
VR1: Top Overlay "1" at 55.88,116.84 h1.5; Top Overlay "2" at 58.42,116.84 h1.5; Top Overlay "3" at 60.96,116.84 h1.5